# Altium PCB LinkS-a.PcbDoc
Units mm, origin at the board's own origin, x right, y up, seen from the top; angles counter-clockwise.
Board outline 29 x 55 mm, 2 copper layers (Top Layer, Bottom Layer); 64 components, 57 nets, 217 pads, 144 vias.
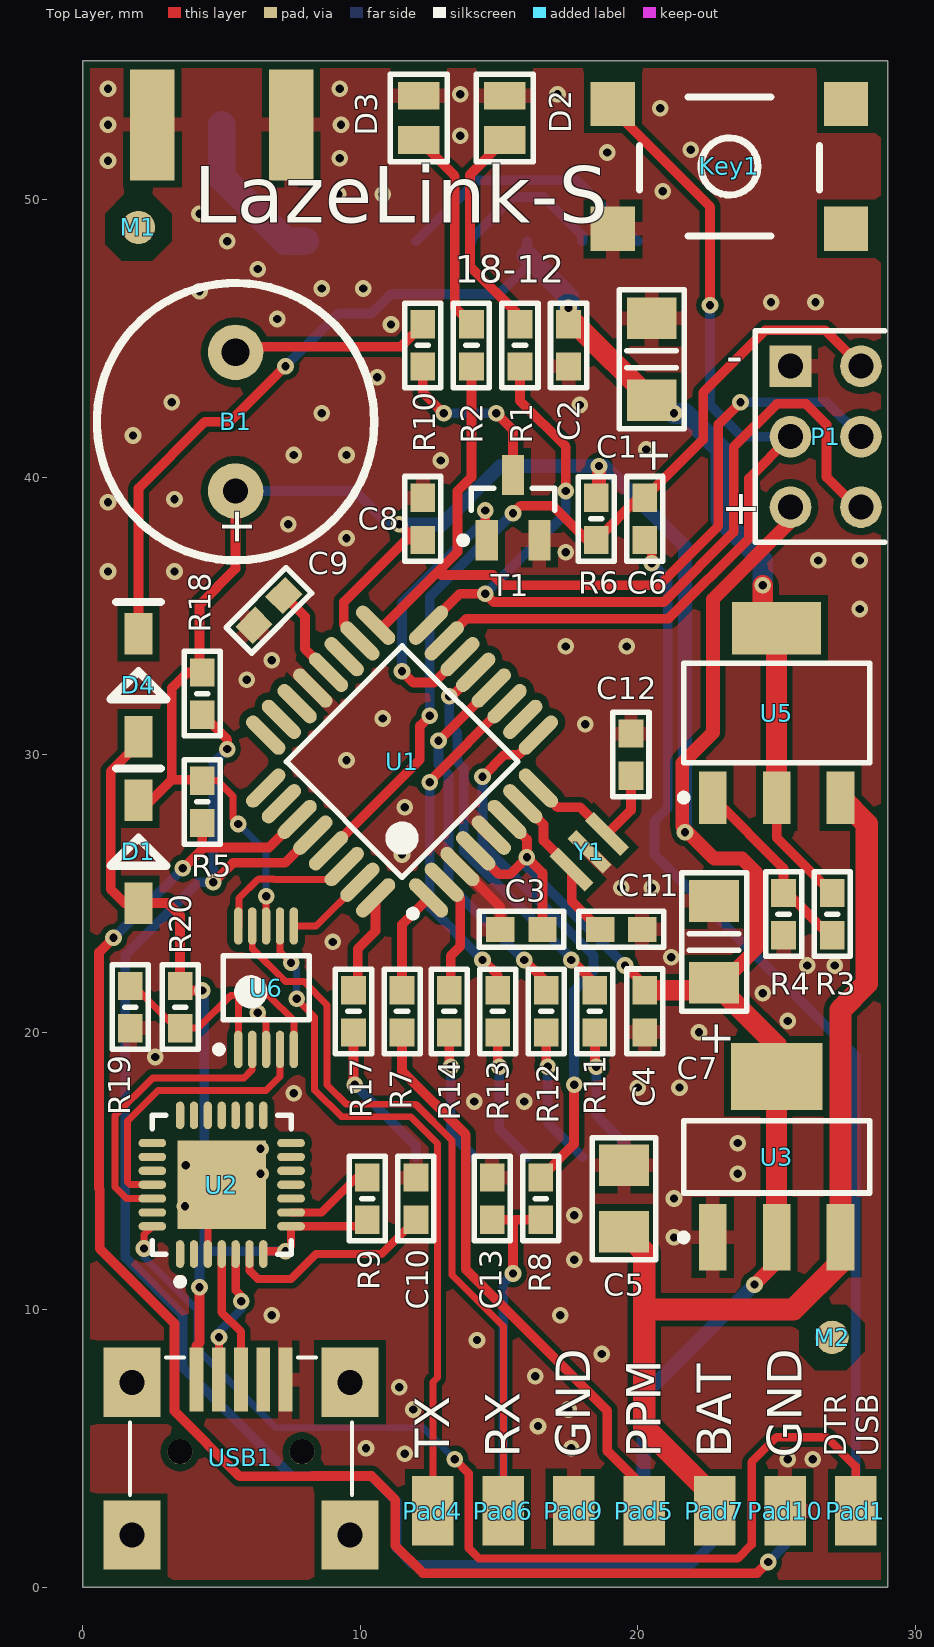
[diagram p0: Top Layer view]
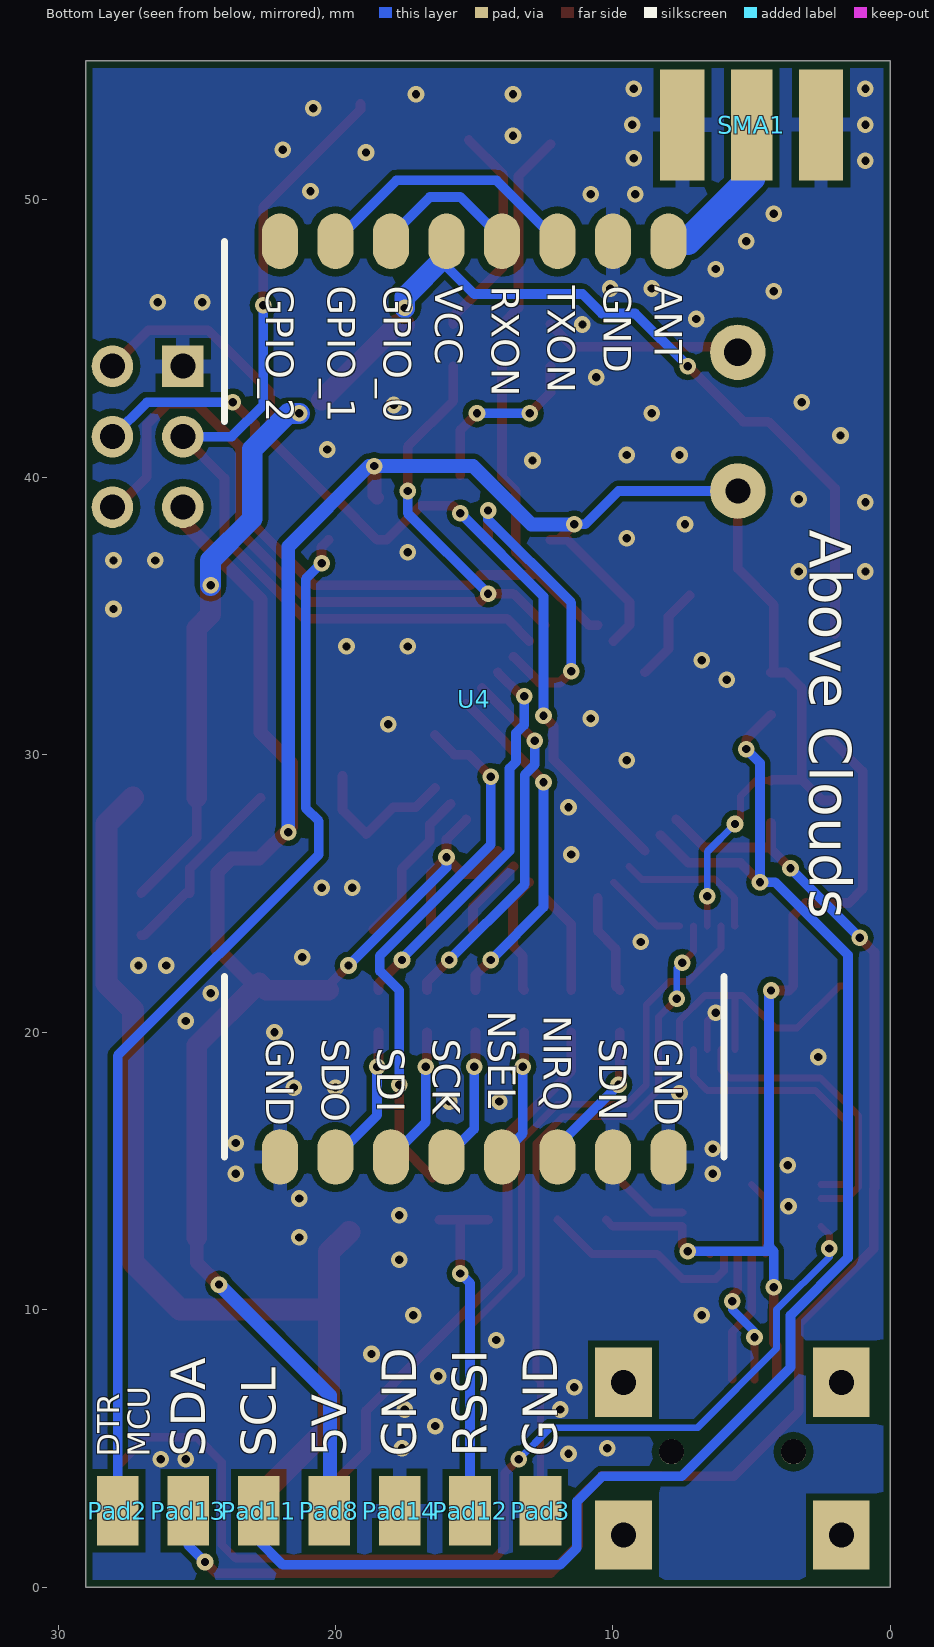
[diagram p1: Bottom Layer view, seen from below]

## Layer stack, top to bottom
Top Solder: solder mask 0.0102, Solder Resist, Dk 3.5
Top Layer: signal copper 0.0356
Dielectric 1: dielectric 0.32, FR-4, Dk 4.8
Bottom Layer: signal copper 0.0356
Bottom Solder: solder mask 0.0102, Solder Resist, Dk 3.5

## Board outline
0,0 29,0 29,55 0,55

## Design rules (kind name [scope] priority, off if disabled: settings)
BoardOutlineClearance BoardOutlineClearance_1 [OnLayer('Top Overlay')] p1: gap=0
BoardOutlineClearance [All] p2: gap=0.25
Clearance [All] p1: gap=0.2 except(0.26: Arc-THPad Arc-Fill Track-THPad Track-Fill SMDPad-THPad SMDPad-Via SMDPad-Fill SMDPad-Poly SMDPad-Region SMDPad-Text THPad-THPad THPad-Via THPad-Fill THPad-Poly THPad-Region THPad-Text Via-Fill Fill-Fill)
ComponentClearance [All] p1: gap=0.2 collisioncheckmode=3 verticalgap=0 showdistances=FALSE
HoleSize [All] p1: absolutevalues=TRUE maxlimit=6 minlimit=0.3 maxpercent=80.000 minpercent=20.000
HoleToHoleClearance [All] p1: gap=0.2 allowstackedmicrovias=TRUE
MinimumSolderMaskSliver [All] p1: minsoldermaskwidth=0
PolygonConnect PolygonConnect_1 [isVia vs InNet('Gnd')] p1: connectstyle=Direct reliefconductorwidth=0.254 reliefentries=4 polygonreliefangle="90 Angle" airgapwidth=0.254
PolygonConnect [All] p2: connectstyle=Relief reliefconductorwidth=0.5 reliefentries=4 polygonreliefangle="90 Angle" airgapwidth=0.254
RoomDefinition LinkS [InComponentClass('LinkS')] p1: confinementstyle=ConfineOut formatcopy=TRUE lockcomponents=FALSE outline 75,-7.581 213.811,-7.581 213.811,69 75,69
RoutingVias [All] p1: holewidth=0.3 width=0.6 viastyle="Through Hole" minholewidth=0.3 minwidth=0.6 maxholewidth=3 maxwidth=3
SilkToSilkClearance [All] p1: silktosilkclearance=0
SilkToSolderMaskClearance [IsPad] p1: minsilkscreentomaskgap=0 clearancetoexposedcopper=TRUE
SolderMaskExpansion [All] p1: expansion=0.102
Width [All] p1: maxlimit=3 minlimit=0.2 preferedwidth=0.35
24 further rules are at their usual default settings.

## Components (designator, comment, footprint, x,y, rotation, side; value= is the part's Value field where it differs from the comment)
B1 "Buzzer" BUZZER9055 5.5,42 r90 top locked
C1 "10uF" "1206 CAP" 20.5,44.25 r90 top
C2 "104" "0603 CAP" 17.5,44.75 r270 top
C3 "104" "0603 CAP" 15.8,23.7 r180 top
C4 "104" "0603 CAP" 20.25,20.75 r270 top
C5 "10uF" 1206 19.5,14 r270 top
C6 "104" "0603 CAP" 20.25,38.5 r270 top
C7 "10uf" "1206 CAP" 22.75,23.25 r90 top
C8 "104" "0603 CAP" 12.25,38.5 r90 top
C9 "104" "0603 CAP" 6.7,35.2 r225 top
C10 "104" "0603 CAP" 12,14 r270 top
C11 "22p" "0603 CAP" 19.4,23.7 r180 top
C12 "22p" "0603 CAP" 19.75,30 r270 top
C13 "1uF" "0603 CAP" 14.75,14 r270 top
D1 "Diode" DIODE-SOD123 2,26.5 r90 top locked
D2 "LED" "0805 LED" 15.2,52.95 r270 top locked
D3 "LED" "0805 LED" 12.1,52.95 r270 top locked
D4 "Diode" DIODE-SOD123 2,32.5 r90 top locked
Key1 "KeySMT" "KEY SMT BIGGER" 23.3,51.2 r90 top locked
M1 "Mark" MarkPoint 2,49 r0 top
M2 "Mark" MarkPoint 27,9 r0 top
P1 "Header 3X2" HDR2X3 25.5,44 r270 top
Pad1 "EdgePad" edgepad 27.85,2.75 r180 top locked
Pad2 "EdgePad" edgepad 27.85,2.75 r0 bottom locked
Pad3 "EdgePad" edgepad 12.61,2.75 r180 bottom locked
Pad4 "EdgePad" edgepad 12.61,2.75 r180 top locked
Pad5 "EdgePad" edgepad 20.23,2.75 r180 top locked
Pad6 "EdgePad" edgepad 15.15,2.75 r180 top locked
Pad7 "EdgePad" edgepad 22.77,2.75 r180 top locked
Pad8 "EdgePad" edgepad 20.23,2.75 r0 bottom locked
Pad9 "EdgePad" edgepad 17.69,2.75 r180 top locked
Pad10 "EdgePad" edgepad 25.31,2.75 r180 top locked
Pad11 "EdgePad" edgepad 22.77,2.75 r0 bottom locked
Pad12 "EdgePad" edgepad 15.15,2.75 r180 bottom locked
Pad13 "EdgePad" edgepad 25.31,2.75 r0 bottom locked
Pad14 "EdgePad" edgepad 17.69,2.75 r180 bottom locked
R1 "300" "0603 RES" 15.75,44.75 r90 top
R2 "300" "0603 RES" 14,44.75 r90 top
R3 "470R" "0603 RES" 27,24.25 r270 top
R4 "1k8" "0603 RES" 25.25,24.25 r270 top
R5 "4k7" "0603 RES" 4.3,28.3 r90 top
R6 "10K" "0603 RES" 18.5,38.5 r90 top
R7 "1K" "0603 RES" 11.5,20.75 r90 top
R8 "10K" "0603 RES" 16.5,14 r90 top
R9 "10K" "0603 RES" 10.25,14 r270 top
R10 "100" "0603 RES" 12.25,44.75 r270 top
R11 "3k3" "0603 RES" 18.45,20.75 r90 top
R12 "3k3" "0603 RES" 16.7,20.75 r90 top
R13 "3k3" "0603 RES" 14.95,20.75 r90 top
R14 "3k3" "0603 RES" 13.2,20.75 r90 top
R17 "3k3" "0603 RES" 9.75,20.75 r90 top
R18 "4k7" "0603 RES" 4.3,32.2 r90 top
R19 "10k" "0603 RES" 1.7,20.9 r90 top
R20 "1k" "0603 RES" 3.5,20.9 r90 top
SMA1 "SMA Base" "ANT SMA" 5,52.7 r0 bottom locked
T1 "NPN" NPN-SOT-23B_M 15.5,38.9 r90 top locked
U1 "ATmega328" ATMEGA328FIX 11.5,29.75 r135 top locked
U2 "CP2102" CP2102 5,14.5 r90 top locked
U3 "AMS1117" ams1117 25,15.5 r90 top
U4 "RFM23" RFM23MODULE 15,32 r270 bottom locked
U5 "LM317" SOT230P700X180-4N 25,31.5 r90 top
U6 "TS5A23157" TS5A23157 6.6,21.6 r90 top locked
USB1 "USB" "MINI USB A" 5.75,4.25 r0 top locked
Y1 "Crystal3Foot" Crystal3Foot 18.25,26.5 r45 top

## Footprints (in the part's own frame and the unit in brackets; to place one, negate y for a bottom-side part, rotate by r counter-clockwise, add the part's x,y. Pads: shape width x height; smd on the part's side, far side on the other; paste and mask are expansions set on the pad)
"0603 CAP" [mil]
  rect 40x35 smd: 1(-29.92,0) 2(29.92,0)
  silkscreen extent -60,-26 60,26, body extent -31,-16 31,16, height 24
"0603 RES" [mil]
  rect 40x35 smd: 1(-29.92,0) 2(29.92,0)
  silkscreen extent -60,-26 60,26, body extent -31,-16 31,16, height 20
"0805 LED" [mm]
  rect 1x1.5 smd: 1(0.8,0) 2(-0.8,0)
  silkscreen extent -1.58,-1.02 1.58,1.02, body extent -1,-0.55 1,0.55, height 0.5
1206 [mm]
  rect 1.5x1.8 smd: 1(-1.2,0) 2(1.2,0)
  silkscreen extent -2.2,-1.15 2.2,1.15, body extent -1.7,-0.9 1.7,0.9, height 1.5
"1206 CAP" [mm]
  rect 1.5x1.8 smd: 1(-1.475,0) 2(1.475,0)
  silkscreen extent -2.5,-1.18 2.5,1.17, body extent -1.7,-0.9 1.7,0.9, height 1.5
ams1117 [mm] "SOT223, 4-Leads, Body 6.7x7.3mm (max), Pitch 2.30mm, IPC Medium Density"
  rect 2.4x1 smd: 1(-2.9,2.3) 2(-2.9,0) 3(-2.9,-2.3)
  rect 2.4x3.3 smd: 4(2.9,0)
  silkscreen extent -3.02,-3.35 1.3,3.47, body extent -1.85,-3.35 1.85,3.35, height 1.8
"ANT SMA" [mm]
  rect 1.5x4 smd: 1(0,0)
  rect 1.6x4 smd far side: 2(-2.5,0) 2(2.5,0)
  rect 1.6x4 smd: 2(-2.5,0) 2(2.5,0)
ATMEGA328FIX [mm] "QFP, 32-Leads, Body 9.0x9.0mm (max), Pitch 0.80mm, IPC Medium Density"
  oval 1.8x0.5 smd: 1(-4.15,2.8) 2(-4.15,2) 3(-4.15,1.2) 4(-4.15,0.4) 5(-4.15,-0.4) 6(-4.15,-1.2) 7(-4.15,-2) 8(-4.15,-2.8) 17(4.15,-2.8) 18(4.15,-2) 19(4.15,-1.2) 20(4.15,-0.4) 21(4.15,0.4) 22(4.15,1.2) 23(4.15,2) 24(4.15,2.8)
  oval 0.5x1.8 smd: 9(-2.8,-4.15) 10(-2,-4.15) 11(-1.2,-4.15) 12(-0.4,-4.15) 13(0.4,-4.15) 14(1.2,-4.15) 15(2,-4.15) 16(2.8,-4.15) 25(2.8,4.15) 26(2,4.15) 27(1.2,4.15) 28(0.4,4.15) 29(-0.4,4.15) 30(-1.2,4.15) 31(-2,4.15) 32(-2.8,4.15)
  silkscreen extent -4.27,-2.95 2.95,3.72, body extent -3.5,-3.5 3.5,3.5, height 2
BUZZER9055 [mm]
  round 2 hole 0.9: 1(-2.5,0)
  round 2 hole 1: 2(2.5,0)
  silkscreen extent -5,-5 5,5
CP2102 [mm] "QFN, 28-Leads, Body 5.0x5.0mm (max), Pitch 0.50mm, IPC Low Density"
  oval 1x0.3 smd: 1(-2.5,1.5) 2(-2.5,1) 3(-2.5,0.5) 4(-2.5,0) 5(-2.5,-0.5) 6(-2.5,-1) 7(-2.5,-1.5) 15(2.5,-1.5) 16(2.5,-1) 17(2.5,-0.5) 18(2.5,0) 19(2.5,0.5) 20(2.5,1) 21(2.5,1.5)
  oval 0.3x1 smd: 8(-1.5,-2.5) 9(-1,-2.5) 10(-0.5,-2.5) 11(0,-2.5) 12(0.5,-2.5) 13(1,-2.5) 14(1.5,-2.5) 22(1.5,2.5) 23(1,2.5) 24(0.5,2.5) 25(0,2.5) 26(-0.5,2.5) 27(-1,2.5) 28(-1.5,2.5)
  rect 3.2x3.2 smd: 29(0,0)
  silkscreen extent -3.62,-2.5 2.5,2.5, body extent -2.5,-2.5 2.5,2.5, height 1
Crystal3Foot [mm]
  rect 0.45x1.8 smd: 1(-0.9,0) 2(0,0) 3(0.9,0)
  body extent -1.5,-0.8 1.5,0.8, height 0.5
DIODE-SOD123 [mm]
  rect 1.5x1 smd: 1(-1.85,0) 2(1.85,0)
  silkscreen extent -0.5,-1 3,1, body extent -1.25,-0.75 1.25,0.75, height 1
edgepad [mm]
  rect 1.5x2.5 smd: 1(0,0)
HDR2X3 [mm] "Connector; Header; 3x2 Position"
  rect 1.5x1.5 hole 0.9: 1(0,0)
  round 1.5 hole 0.9: 2(0,2.54) 3(2.54,0) 4(2.54,2.54) 5(5.08,0) 6(5.08,2.54)
  silkscreen extent -1.27,-1.27 6.35,3.4
"KEY SMT BIGGER" [mm]
  rect 1.6x1.6 smd: 1(-2.25,4.2) 2(-2.25,-4.2) 3(2.25,-4.2) 4(2.25,4.2)
  silkscreen extent -2.5,-3.25 2.5,3.25
MarkPoint [mm]
  round 1.2 smd: 0(0,0)
  round 1.8 on Top Solder: 0(0,0)
  Top Layer pour cut-out: -0.5,1.2 0.5,1.2 1.2,0.5 1.2,-0.5 0.5,-1.2 -0.6,-1.2 -1.2,-0.6 -1.2,0.5
"MINI USB A" [mm]
  rect 2.05x2.5 hole 0.9 unplated: 0(-3.98,-2.374) 0(-3.98,3.126) 0(3.87,-2.374) 0(3.87,3.126)
  rect 0.5x2.3 smd mask+0.085: 1(-1.655,3.226) 2(-0.855,3.226) 3(-0.055,3.226) 4(0.745,3.226) 5(1.545,3.226)
  round 0.9 hole 0.9 unplated: 6(-2.255,0.626) 6(2.145,0.626)
  silkscreen extent -4.06,-0.92 3.95,4.03, body extent -5.1,-5.22 4.8,3.98, height 4.17
NPN-SOT-23B_M [mm] "SOT23, 3-Leads, Body 2.9x1.3mm, Pitch 0.95mm, Lead Span 2.4mm, IPC Low Density"
  rect 1.45x0.8 smd: 1(-1.175,0.95) 2(-1.175,-0.95) 3(1.175,0)
  silkscreen extent -1.3,-1.5 0.7,1.92, body extent -0.7,-1.5 0.7,1.5, height 1.14
RFM23MODULE [mm]
  oval 2x1.3 smd: 1(16.5,-7) 2(16.5,-5) 3(16.5,-3) 4(16.5,-1) 5(16.5,1) 6(16.5,3) 7(16.5,5) 8(16.5,7) 9(-16.5,7) 10(-16.5,5) 11(-16.5,3) 12(-16.5,1) 13(-16.5,-1) 14(-16.5,-3) 15(-16.5,-5) 16(-16.5,-7)
  silkscreen extent -16.5,-9 16.5,9
SOT230P700X180-4N [mm] "SOT223, 4-Leads, Body 6.50x7.00mm (avg), Pitch 2.30mm, IPC Medium Density"
  rect 1.9x1 smd: 1(-3.05,2.3) 2(-3.05,0) 3(-3.05,-2.3)
  rect 1.9x3.2 smd: 4(3.05,0)
  silkscreen extent -3.17,-3.35 1.8,3.47, body extent -1.78,-3.35 1.78,3.35, height 1.8
TS5A23157 [mm] "TSSOP, 10-Leads, Body 3.00x3.00mm, Pitch 0.50mm, IPC Medium Density"
  oval 1.35x0.3 smd: 1(-2.225,1) 2(-2.225,0.5) 3(-2.225,0) 4(-2.225,-0.5) 5(-2.225,-1) 6(2.225,-1) 7(2.225,-0.5) 8(2.225,0) 9(2.225,0.5) 10(2.225,1)
  silkscreen extent -2.35,-1.55 1.15,1.82, body extent -1.55,-1.55 1.55,1.55, height 1.1

## Part data
C1 C2 C3 C4 C5 C6 C8 C9 C10 C11 C12 C13: library part CAP, "Capacitor"
C7: library part "Cap Pol", "Capacitor"
D2 D3: "Typical RED, GREEN, YELLOW, AMBER GaAs LED"
P1: "Header, 3-Pin, Dual row"
R1 R2 R3 R4 R5 R6 R7 R8 R9 R10 R11 R12 R13 R14 R17 R18 R19 R20: library part Res, "Resistor"
U3: "1117"
USB1: library part USB_SMT_B, "USB Type-B SMT Socket"

## Via types
v1: diameter 0.6, hole 0.3, Top Layer to Bottom Layer, tented both sides, 144 vias

## Nets (pads, with @x,y where several pads share a name; then routed paths per layer and width w, separated by ;. In a path a pad name is that pad's centre, name@x,y a point inside that pad or via, vN(x,y) a via of type N, cw(c..) or ccw(c..) an arc to the next point about the centre after c; other vN are vias at no path point)
5V_MCU: B1.1 C3.1 C4.1 C7.1 C8.1 D1.2 P1.5 Pad8.1 R5.2 R6.2 R18.2 U1.4 U1.6 U1.18 U3.2 U3.4 U6.8 | length 117.1
  Top Layer w0.25: R5.2 4.84,29.06 5.4,28.5 5.4,27.7 v1(5.6,27.5) ; U6.8 v1(6.6,24.9)
  Top Layer w0.35: D1.2 2.45,28.35 3.2,29.1 ; R5.2 4.26,29.1 3.2,29.1 ; B1.1 5.5,36.7 4.2,35.4 4.2,33.06 R18.2 3.76,32.96 3.2,32.4 3.2,29.1 ; U1.18 9.4,34.678 9.4,35.5 11.64,37.74 C8.1 11.96,37.74 v1(11.4,38.3) ; U1.4@14.152,26.448 U1.4 15,25.684 15.384,25.684 v1(16,26.3) ; U1.6 16,26.947 v1(16,26.3) ; C3.1 16.56,25.74 v1(16,26.3) ; v1(19.532,22.4) 20.25,21.682 C4.1
  Top Layer w0.5: R6.2 18.6,39.36 v1(18.6,40.4) ; C7.1 23.025,21.775 24.25,23 24.25,25.75 23.75,26.25 22.75,26.25 21.6,27.4 21.6,29.7 22.7,30.8 22.7,35.6 25.5,38.4 P1.5 ; v1(24.2,10.9) 25,11.7 U3.2
  Top Layer w0.75: C4.1 22.485,21.51 C7.1 25,19.525 U3.4 U3.2
  Bottom Layer w0.25: v1(5.6,27.5) 6.6,26.5 v1(6.6,24.9)
  Bottom Layer w0.35: B1.1 9.8,39.5 11,38.3 v1(11.4,38.3) ; v1(16,26.3) 16,25.932 v1(19.532,22.4) v1@19.6,22.4
  Bottom Layer w0.5: v1(11.4,38.3) 12.939,38.3 15.039,40.4 v1(18.6,40.4) 18.8,40.4 21.7,37.5 v1(21.7,27.2) ; Pad8.1 20.2,2.78 20.2,6.9 v1(24.2,10.9)
5V_USB: D1.1 D4.1 R9.2 R20.2 U2.7 U2.8 USB1.1 | length 34.4
  Top Layer w0.3: U2.7 6.6,12.1 v1(7.3,12.1) 7.5,12.3 U2.8 10.01,13 R9.2
  Top Layer w0.35: D4.1@2.25,30.65 1,29.4 1,25.15 1.5,24.65 3.05,24.65 3.5,24.2 R20.2 3.66,21.5 v1(4.3,21.5) ; USB1.1 4.095,8.695 4.2,8.8 v1(4.2,10.8)
  Bottom Layer w0.35: v1(4.2,10.8) 4.2,12.1 ; v1@4.4,21.5 v1(4.3,21.5) 4.375,21.425 4.375,12.325 4.4,12.3 4.2,12.1 ; v1(7.3,12.1) 4.2,12.1
6V: C1.1 C2.1 D4.2 R3.1 U4.13 U5.2 U5.4 | length 50
  Top Layer w0.35: D4.2 2,39.6 4.4,42 5.3,42 v1(7.3,44) ; U5.2 25,27.01 R3.1
  Top Layer w0.75: C2.1 17.51,45.5 17.775,45.5 C1.1 ; v1(24.5,36.1) 24.5,35.05 U5.4 U5.2
  Bottom Layer w0.35: v1(7.3,44) 9.2,45.9 10.4,45.9 11.1,46.6 15,46.6 16,47.6 16,48 U4.13
  Bottom Layer w0.75: U4.13@16,48 17.5,46.5 v1(17.5,46.1) ; v1(21.3,42.3) 21.7,42.3 23,41 23,38.5 24.5,37 v1(24.5,36.1)
A0: U1.23
A1: U1.24
A2: U1.25
A3: U1.26
A4/SDA: Pad13.1 R5.1 U1.27 | length 54.8
  Top Layer w0.35: v1(1.1,23.4) 0.575,22.875 0.575,14.375 0.6,14.35 0.6,12.2 3.3,9.5 3.3,6.341 5.65,3.991 8.262,3.991 8.271,4 10.4,4 11.25,3.15 11.25,1.5 12.25,0.5 24.3,0.5 v1(24.7,0.9) ; v1(3.6,25.9) 4.3,26.6 ; R5.1 4.3,26.6 ; U1.27 6.703,26.65 4.35,26.65 4.3,26.6
  Bottom Layer w0.35: v1(1.1,23.4) v1(3.6,25.9) ; v1(24.7,0.9) 25.31,1.51 Pad13.1
A5/SCL: Pad11.1 R18.1 U1.28 | length 55.4
  Top Layer w0.35: R18.1 5.2,30.54 v1(5.2,30.2) ; v1(4.7,25.4) 5.4,26.1 7.284,26.1 U1.28
  Bottom Layer w0.35: v1(5.2,30.2) 4.7,29.7 v1(4.7,25.4) 4.145,25.4 1.525,22.78 1.525,11.868 3.6,9.793 3.6,7.919 7.528,3.991 10.395,3.991 11.3,3.086 11.3,1.4 11.9,0.8 21.9,0.8 22.77,1.67 Pad11.1
A6: U1.19
A7: U1.22
ANT: SMA1.1 U4.9 | length 5.9
  Bottom Layer w1: SMA1.1 5,50.8 7.3,48.5 U4.9
AREF: C9.1 U1.20 | length 3.4
  Top Layer w0.35: C9.1 8,34.975 8,33.816 U1.20
BAT: C5.2 Pad7.1 U3.3 U5.3 | length 36.7
  Top Layer w0.8: C5.2 20.23,12.07 20.23,5.77 22.77,3.23 Pad7.1 ; 20.23,10 25.6,10 27.3,11.7 U3.3 27.3,20.8 28.25,21.75 28.25,27.5 U5.3
D2: R17.2 U1.32 | length 3.7
  Top Layer w0.35: R17.2 9.9,21.66 9.9,23 10.545,23.645 U1.32
D3: R7.2 U1.1 | length 3.7
  Top Layer w0.35: R7.2 11.5,23.881 U1.1
D4: R14.2 U1.2 | length 4.3
  Top Layer w0.35: U1.2 13.6,24.822 13.6,23.1 13.25,22.75 13.25,21.56 R14.2
D5: R8.2 U1.9 | length 19.5
  Top Layer w0.35: v1(14.4,29.2) 15.2,30 15.71,30 U1.9 ; R8.2 17.7,15.96 v1(17.7,18.1)
  Bottom Layer w0.35: v1(14.4,29.2) 14.4,26.755 18.4,22.755 18.4,22.2 17.7,21.5 v1(17.7,18.1)
D6: U1.10
D7: R13.2 U1.11 | length 12.5
  Top Layer w0.35: v1(12.5,29) 12.5,29.053 U1.11 ; v1(14.4,22.6) 14.95,22.05 R13.2
  Bottom Layer w0.35: v1(12.5,29) 12.5,24.5 v1(14.4,22.6)
D8: R12.2 U1.12 | length 13.3
  Top Layer w0.35: v1(12.816,30.5) U1.12 ; v1(15.9,22.6) 16.7,21.8 R12.2
  Bottom Layer w0.35: v1(12.816,30.5) 12.816,29.639 13.175,29.28 13.175,25.325 v1(15.9,22.6)
D9: R11.2 U1.13 | length 14.1
  Top Layer w0.35: v1(13.2,32.1) 13.284,32.1 U1.13 ; v1(17.6,22.6) 18.45,21.75 R11.2
  Bottom Layer w0.35: v1(13.2,32.1) 13.2,31.07 13.491,30.78 13.491,29.742 13.725,29.507 13.725,26.525 17.6,22.65 v1(17.6,22.6)
D10: T1.1 U1.14 | length 10.8
  Top Layer w0.35: v1(11.5,33) 11.9,32.6 12.653,32.6 U1.14 ; v1(14.5,38.8) 14.5,37.775 T1.1
  Bottom Layer w0.35: v1(11.5,33) 11.5,35.478 14.5,38.478 v1(14.5,38.8)
D11/MO: Key1.4 P1.3 U1.15 | length 32.5
  Top Layer w0.35: U1.15 13.822,34.9 21.11,34.9 24,37.79 24,39.96 P1.3 ; Key1.4 19.1,53.25 22.6,49.75 v1(22.6,46.2)
  Bottom Layer w0.35: v1(22.6,46.2) 22.6,42.6 23.74,41.46 P1.3
D12/MI: P1.6 R1.1 U1.16 | length 33.7
  Top Layer w0.35: U1.16 13.59,35.8 v1(14.5,35.8) 14.8,35.5 20.932,35.5 23.45,38.018 23.45,41.086 25.009,42.645 26.055,42.645 26.8,41.9 26.8,40 27.88,38.92 P1.6 ; R1.1 15.75,42.75 17.4,41.1 v1(17.4,39.5)
  Bottom Layer w0.35: v1(14.5,35.8) 17.4,38.7 v1(17.4,39.5)
D13/SCK: P1.4 R2.1 U1.17 | length 31.8
  Top Layer w0.35: U1.17 10.864,34.664 12.8,36.6 ; R2.1 14,40 13.5,39.5 13.5,37.3 12.8,36.6 ; v1(23.7,42.7) 22.9,41.9 22.9,38.245 20.755,36.1 15.155,36.1 14.78,36.475 12.925,36.475 12.8,36.6
  Bottom Layer w0.35: v1(23.7,42.7) 26.8,42.7 P1.4
DTR-AVR: C6.2 Pad2.1 | length 38.5
  Top Layer w0.35: C6.2 20.5,37.49 v1(20.5,36.9)
  Bottom Layer w0.35: v1(20.5,36.9) 21.075,36.325 21.075,28.075 20.6,27.6 20.6,26.4 27.85,19.15 Pad2.1
DTR-USB: Pad1.1 U2.28 | length 39.4
  Top Layer w0.25: v1(2.2,12.2) 2.2,12.7 U2.28
  Top Layer w0.3: v1(13.4,4.6) 13.9,4.1 13.9,1.4 14.275,1.025 23.6,1.025 24.1,1.525 24.1,4.5 25,5.4 26.8,5.4 27.85,4.35 Pad1.1
  Bottom Layer w0.25: v1(2.2,12.2) 2.2,11.9 4.1,10 4.1,8.6 6.959,5.741 12.259,5.741 v1(13.4,4.6)
GND: C1.2 C2.2 C3.2 C4.2 C5.1 C7.2 C8.2 C9.2 C10.1 C11.1 C12.1 C13.1 D2.2 D3.2 Key1.1 P1.1 Pad3.1 Pad9.1 Pad10.1 Pad14.1 R4.2 R19.1 SMA1.2 T1.2 U1.3 U1.5 U1.21 U2.3 U2.29 U3.1 U4.1 U4.7 U4.8 U4.10 U6.3 USB1.5 Y1.2 | length 7
  Top Layer w0.25: U2.3 4.5,14 U2.29 ; v1(6.3,20.7) 6.6,20.4 U6.3
  Top Layer w0.35: U1.3 15.04,24.513 C3.2
  other v1: 25.4,4.6 26.3,4.6 11.6,4.8 10.2,5 17.6,5 16.4,5.8 11.9,6.4 17.5,6.4 11.4,7.2 16.3,7.6 18.7,8.4 14.2,8.9 6.8,9.8 17.2,9.8 17.7,11.8 21.3,12.6 17.7,13.4 3.675,13.725 21.3,14 6.4,14.9 23.6,14.9 3.7,15.2 6.4,15.8 23.6,16 14.1,17.5 15.9,17.5 7.6,17.8 20,18 21.5,18 2.6,19.1 22.2,20 25.4,20.4 24.5,21.4 26.1,22.4 27.1,22.4 21.2,22.7 9,23.25 19.4,25.2 20.5,25.2 11.5,26.4 11.6,28.1 9.5,29.8 18.1,31.1 10.8,31.3 5.9,32.7 6.8,33.4 17.4,33.9 19.6,33.9 28,35.25 0.9,36.6 3.3,36.6 26.5,37 28,37 17.4,37.3 9.5,37.8 7.4,38.3 0.9,39.1 3.3,39.2 12.9,40.6 7.6,40.8 9.5,40.8 20.3,41 1.8,41.5 8.6,42.3 17.9,42.6 3.2,42.7 10.6,43.6 11.1,45.5 7,45.7 24.8,46.3 26.4,46.3 4.2,46.7 8.6,46.8 10.1,46.8 6.3,47.5 5.2,48.5 4.2,49.5 9.2,50.2 10.8,50.2 20.9,50.3 0.9,51.4 9.25,51.5 18.9,51.7 21.9,51.8 13.6,52.3 0.9,52.7 9.3,52.7 20.8,53.3 13.6,53.8 17.1,53.8 0.9,54 9.25,54
NetB1_2: B1.2 R10.1 | length 7.2
  Top Layer w0.35: B1.2 5.7,44.7 11.44,44.7 R10.1
NetC10_2: C10.2 U2.6 | length 7.5
  Top Layer w0.3: U2.6@6,11.9 6,11.4 6.3,11.1 7.5,11.1 8.4,12 10.76,12 C10.2
NetC11_2: C11.2 U1.7 Y1.1 | length 5.7
  Top Layer w0.35: U1.7 16.6,27.478 16.6,26.9 17.614,25.886 Y1.1 17.614,24.726 C11.2
NetC12_2: C12.2 U1.8 Y1.3 | length 5.6
  Top Layer w0.35: U1.8 17.11,28.1 17.923,28.1 Y1.3 19.75,28 C12.2
NetD2_1: D2.1 R1.2 | length 7.9
  Top Layer w0.35: D2.1 13.95,50.9 13.95,47.6 15.75,45.8 R1.2
NetD3_1: D3.1 R2.2 | length 7.2
  Top Layer w0.35: D3.1@12.25,52 13.4,50.85 13.4,46.11 R2.2
NetR3_2: R3.2 R4.1 U5.1 | length 6.9
  Top Layer w0.35: U5.1 25.25,25.9 R4.1 25.39,25.01 26.91,23.49 R3.2
NetR9_1: R9.1 U2.9 | length 3.3
  Top Layer w0.3: U2.9 8.6,13.5 9.86,14.76 R9.1
NetR10_2: R10.2 T1.3 | length 6.4
  Top Layer w0.35: R10.2 12.25,43.05 v1(13,42.3) ; v1(14.9,42.3) 15.5,41.7 T1.3
  Bottom Layer w0.35: v1(13,42.3) v1(14.9,42.3)
NetR19_2: R19.2 R20.1 U6.1 U6.5 | length 10.4
  Top Layer w0.25: R19.2 1.84,21.66 3.36,20.14 R20.1 4.14,20.14 5.325,21.325 5.6,21.325 ; U6.1 5.6,21.325 ; U6.5 7.6,20.416 6.691,21.325 5.6,21.325
NetU4_11: U4.11 U4.15 | length 9.8
  Bottom Layer w0.35: U4.11 14.2,50.7 17.8,50.7 U4.15
NetU4_12: U4.12 U4.14 | length 5.5
  Bottom Layer w0.35: U4.12 14,48.6 15.5,50.1 16.6,50.1 18,48.7 U4.14
NIRQ: R17.1 U4.6 | length 5.4
  Top Layer w0.35: R17.1 9.75,18.15 v1(9.8,18.1)
  Bottom Layer w0.35: v1(9.8,18.1) 12,15.9 U4.6
NSEL: R14.1 U4.5 | length 4.8
  Top Layer w0.35: R14.1 13.2,18.8 v1(13.25,18.75)
  Bottom Layer w0.35: v1(13.25,18.75) 13.25,16.35 14,15.6 U4.5
PPM: Pad5.1 R7.1 | length 20.9
  Top Layer w0.35: R7.1 11.5,18.6 13.8,16.3 13.8,11.45 18.9,6.35 18.9,4.9 20.23,3.57 Pad5.1
RESET: C6.1 P1.2 R6.1 U1.29 | length 32.7
  Top Layer w0.35: U1.29 12.141,29.825 12.141,31.041 v1(12.5,31.4) ; v1(15.5,38.7) 15.775,38.975 16.925,38.975 18.16,37.74 R6.1 20.02,39.26 C6.1 22.35,41.36 22.35,43.05 24.6,45.3 26.74,45.3 P1.2
  Bottom Layer w0.35: v1(12.5,31.4) 12.5,35.7 v1(15.5,38.7)
RSSI: C13.2 Pad12.1 R8.1 | length 12.4
  Top Layer w0.35: C13.2@14.5,13.24 15.5,13.24 ; v1(15.5,11.3) 15.5,13.24 ; R8.1@16.25,13.24 15.5,13.24
  Bottom Layer w0.35: Pad12.1 15.15,10.95 v1(15.5,11.3)
RX_MCU: U1.30 U6.10 | length 5.3
  Top Layer w0.25: U6.10 5.625,23.825 5.625,24.825 6.298,25.498 6.314,25.498 6.341,25.525 6.859,25.525 6.886,25.498 8.945,25.498 U1.30
RX_OUT: Pad6.1 U6.9 | length 26.7
  Top Layer w0.25: U6.9 6.1,23.016 7.291,21.825 7.959,21.825 8.8,20.984 8.8,18.1 9.5,17.4 11.993,17.4 13.3,16.093 13.3,11.243 15.15,9.393 Pad6.1
RX_USB: U2.26 U6.2 | length 10.5
  Top Layer w0.25: U2.26 1.564,14 1.15,14.414 1.15,16.986 2.514,18.35 5.8,18.35 6.1,18.65 U6.2
SCLK: R13.1 U4.4 | length 4.9
  Top Layer w0.35: R13.1 14.95,18.8 v1(15,18.75)
  Bottom Layer w0.35: v1(15,18.75) 15,16.5 U4.4
SDI: R12.1 U4.3 | length 5
  Top Layer w0.35: R12.1 16.7,18.8 v1(16.75,18.75)
  Bottom Layer w0.35: v1(16.75,18.75) 16.75,16.75 U4.3
SDO: R11.1 U4.2 | length 5.1
  Top Layer w0.35: R11.1 18.45,18.8 v1(18.5,18.75)
  Bottom Layer w0.35: v1(18.5,18.75) 18.5,17 U4.2
TX_MCU: U1.31 U6.6 | length 3
  Top Layer w0.25: U6.6 8.403,23.825 U1.31
TX_OUT: Pad4.1 U6.7 | length 24.9
  Top Layer w0.25: U6.7 7.1,22.9 v1(7.5,22.5) ; v1(7.7,21.2) 8.35,20.55 8.35,17.914 9.314,16.95 11.807,16.95 12.769,15.987 12.769,7.55 12.61,7.39 Pad4.1
  Bottom Layer w0.25: v1(7.5,22.5) 7.7,22.3 v1(7.7,21.2)
TX_USB: U2.25 U6.4 | length 10.3
  Top Layer w0.25: U2.25 1.7,14.5 1.6,14.6 1.6,16.8 2.7,17.9 6.6,17.9 7.1,18.4 U6.4
USB_D+: U2.4 USB1.3 | length 4.7
  Top Layer w0.3: U2.4@5,11.9 5,9.9 5.695,9.205 USB1.3
USB_D-: U2.5 USB1.2 | length 4.8
  Top Layer w0.3: USB1.2 4.9,7.481 v1(4.9,9) ; U2.5@5.5,11.9 5.5,10.7 5.7,10.5 v1(5.7,10.3)
  Bottom Layer w0.3: v1(4.9,9) 4.9,9.2 5.7,10 v1(5.7,10.3)
pads on no net: Key1.2 Key1.3 M1.0 M2.0 U2.1 U2.2 U2.10 U2.11 U2.12 U2.13 U2.14 U2.15 U2.16 U2.17 U2.18 U2.19 U2.20 U2.21 U2.22 U2.23 U2.24 U2.27 U4.16 USB1.0 USB1.4 USB1.6

## Polygon pours and split planes (outlines as drawn)
GND on Top Layer "GND_L01_P002" (solid, pour order 2): 0,0 29,0 29,55 0,55
GND on Bottom Layer "GND_L02_P003" (solid, pour order 3): 0,0 29,0 29,55 0,55

## Silkscreen, mask and mechanical layers (free items; w line width, h text height)
Top Overlay:
  text "LazeLink-S" at 4,48.5 h3.5
  text "18-12" at 13.4,47 h1
  text "-" at 23.8,44.7 h1.25 r180
  text "+" at 23,38.3 h1.25
  text "DTR" at 27.5,4.7 h0.8 r90
  text "USB" at 28.66,4.7 h0.8 r90
  text "TX" at 13.2,4.66 h1.25 r90
  text "RX" at 15.74,4.66 h1.25 r90
  text "GND" at 18.28,4.66 h1.25 r90
  text "PPM" at 20.82,4.66 h1.25 r90
  text "BAT" at 23.36,4.66 h1.25 r90
  text "GND" at 25.9,4.66 h1.25 r90
Bottom Overlay:
  text "Above Clouds" at 2.9,38.1 h1.5 r90
  text "GND" at 12,4.7 h1.25 r270
  text "RSSI" at 14.54,4.7 h1.25 r270
  text "GND" at 17.08,4.7 h1.25 r270
  text "5V" at 19.62,4.7 h1.25 r270
  text "SCL" at 22.16,4.7 h1.25 r270
  text "SDA" at 24.7,4.7 h1.25 r270
  text "MCU" at 26.7,4.7 h0.8 r270
  text "DTR" at 27.8,4.7 h0.8 r270
Mechanical 1:
  the board outline again, w0.3

## Text inside footprints (layer, text, board x,y; h text height)
B1: Top Overlay "+" at 6.1,37.5 h1.25 r90
C1: Top Overlay "+" at 21.1,41.45 h1.2 r90
C7: Top Overlay "+" at 23.35,20.45 h1.2 r90
U4: Bottom Overlay "GND" at 22.5,19.767 h1 r90; Bottom Overlay "SDO" at 20.5,19.767 h1 r90; Bottom Overlay "SDI" at 18.5,19.434 h1 r90; Bottom Overlay "SCK" at 16.5,19.767 h1 r90; Bottom Overlay "NSEL" at 14.5,20.767 h1 r90; Bottom Overlay "NIRQ" at 12.5,20.6 h1 r90; Bottom Overlay "SDN" at 10.5,19.767 h1 r90; Bottom Overlay "GND" at 8.5,19.767 h1 r90; Bottom Overlay "ANT" at 8.5,46.9 h1 r90; Bottom Overlay "GND" at 10.324,46.9 h1 r90; Bottom Overlay "TXON" at 12.348,46.9 h1 r90; Bottom Overlay "RXON" at 14.371,46.9 h1 r90; Bottom Overlay "VCC" at 16.395,46.9 h1 r90; Bottom Overlay "GPIO_0" at 18.252,46.9 h1 r90; Bottom Overlay "GPIO_1" at 20.276,46.9 h1 r90; Bottom Overlay "GPIO_2" at 22.5,46.9 h1 r90